# Altium PCB PCB2.PcbDoc (part 1 of 2)
Units mm, origin at the board's own origin, x right, y up, seen from the top; angles counter-clockwise.
Board outline 39.5 x 39.5 mm, 4 copper layers (Top Layer, Mid Layer 1, Mid Layer 2, Bottom Layer), stack 1.57 mm thick; 82 components, 63 nets, 381 pads, 150 vias.
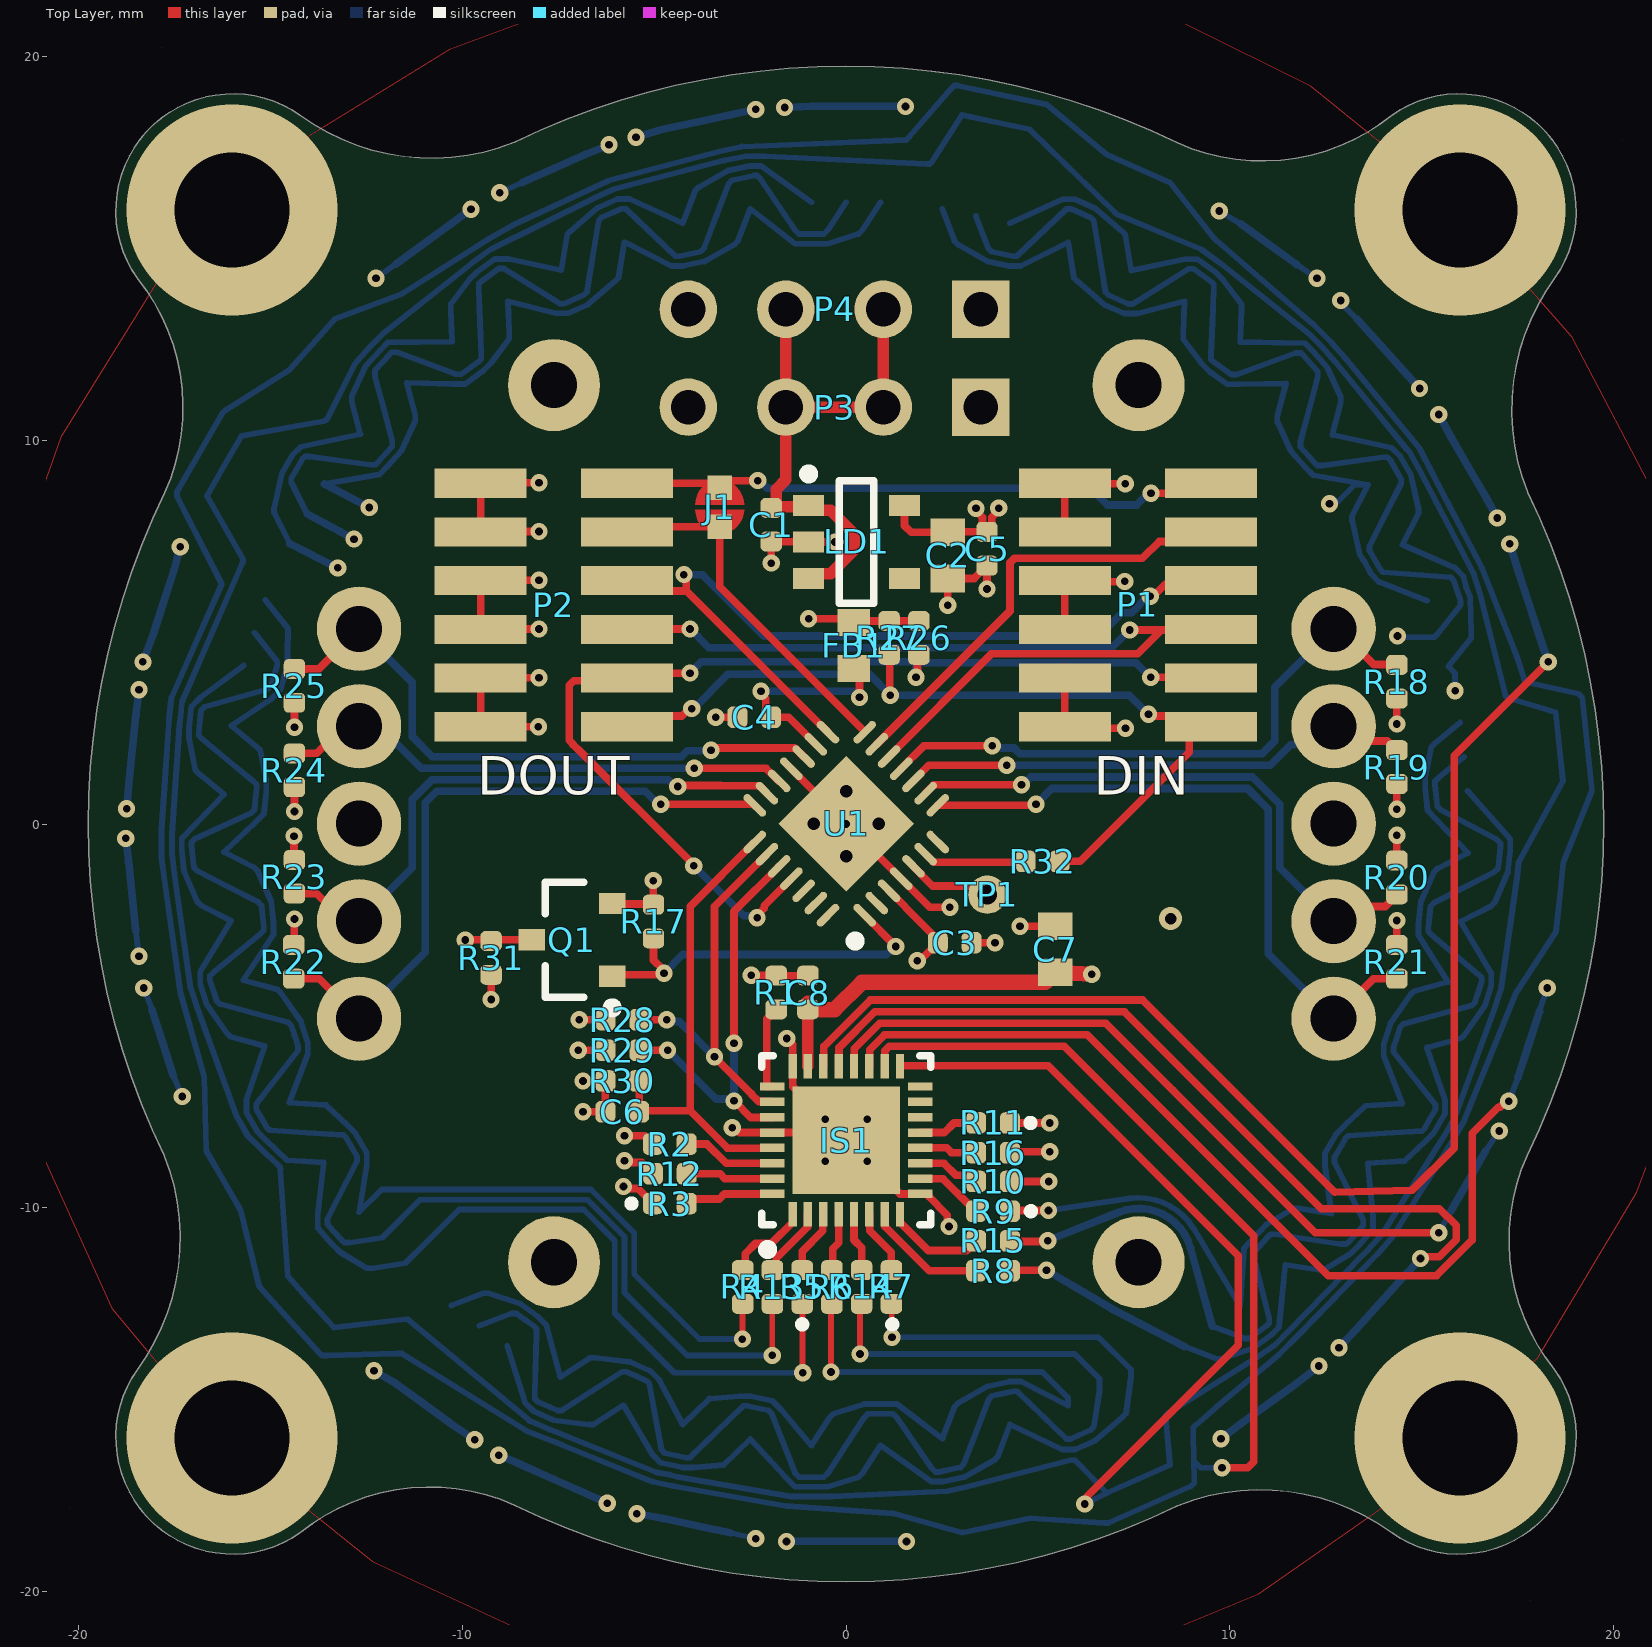
[diagram p0: Top Layer view]
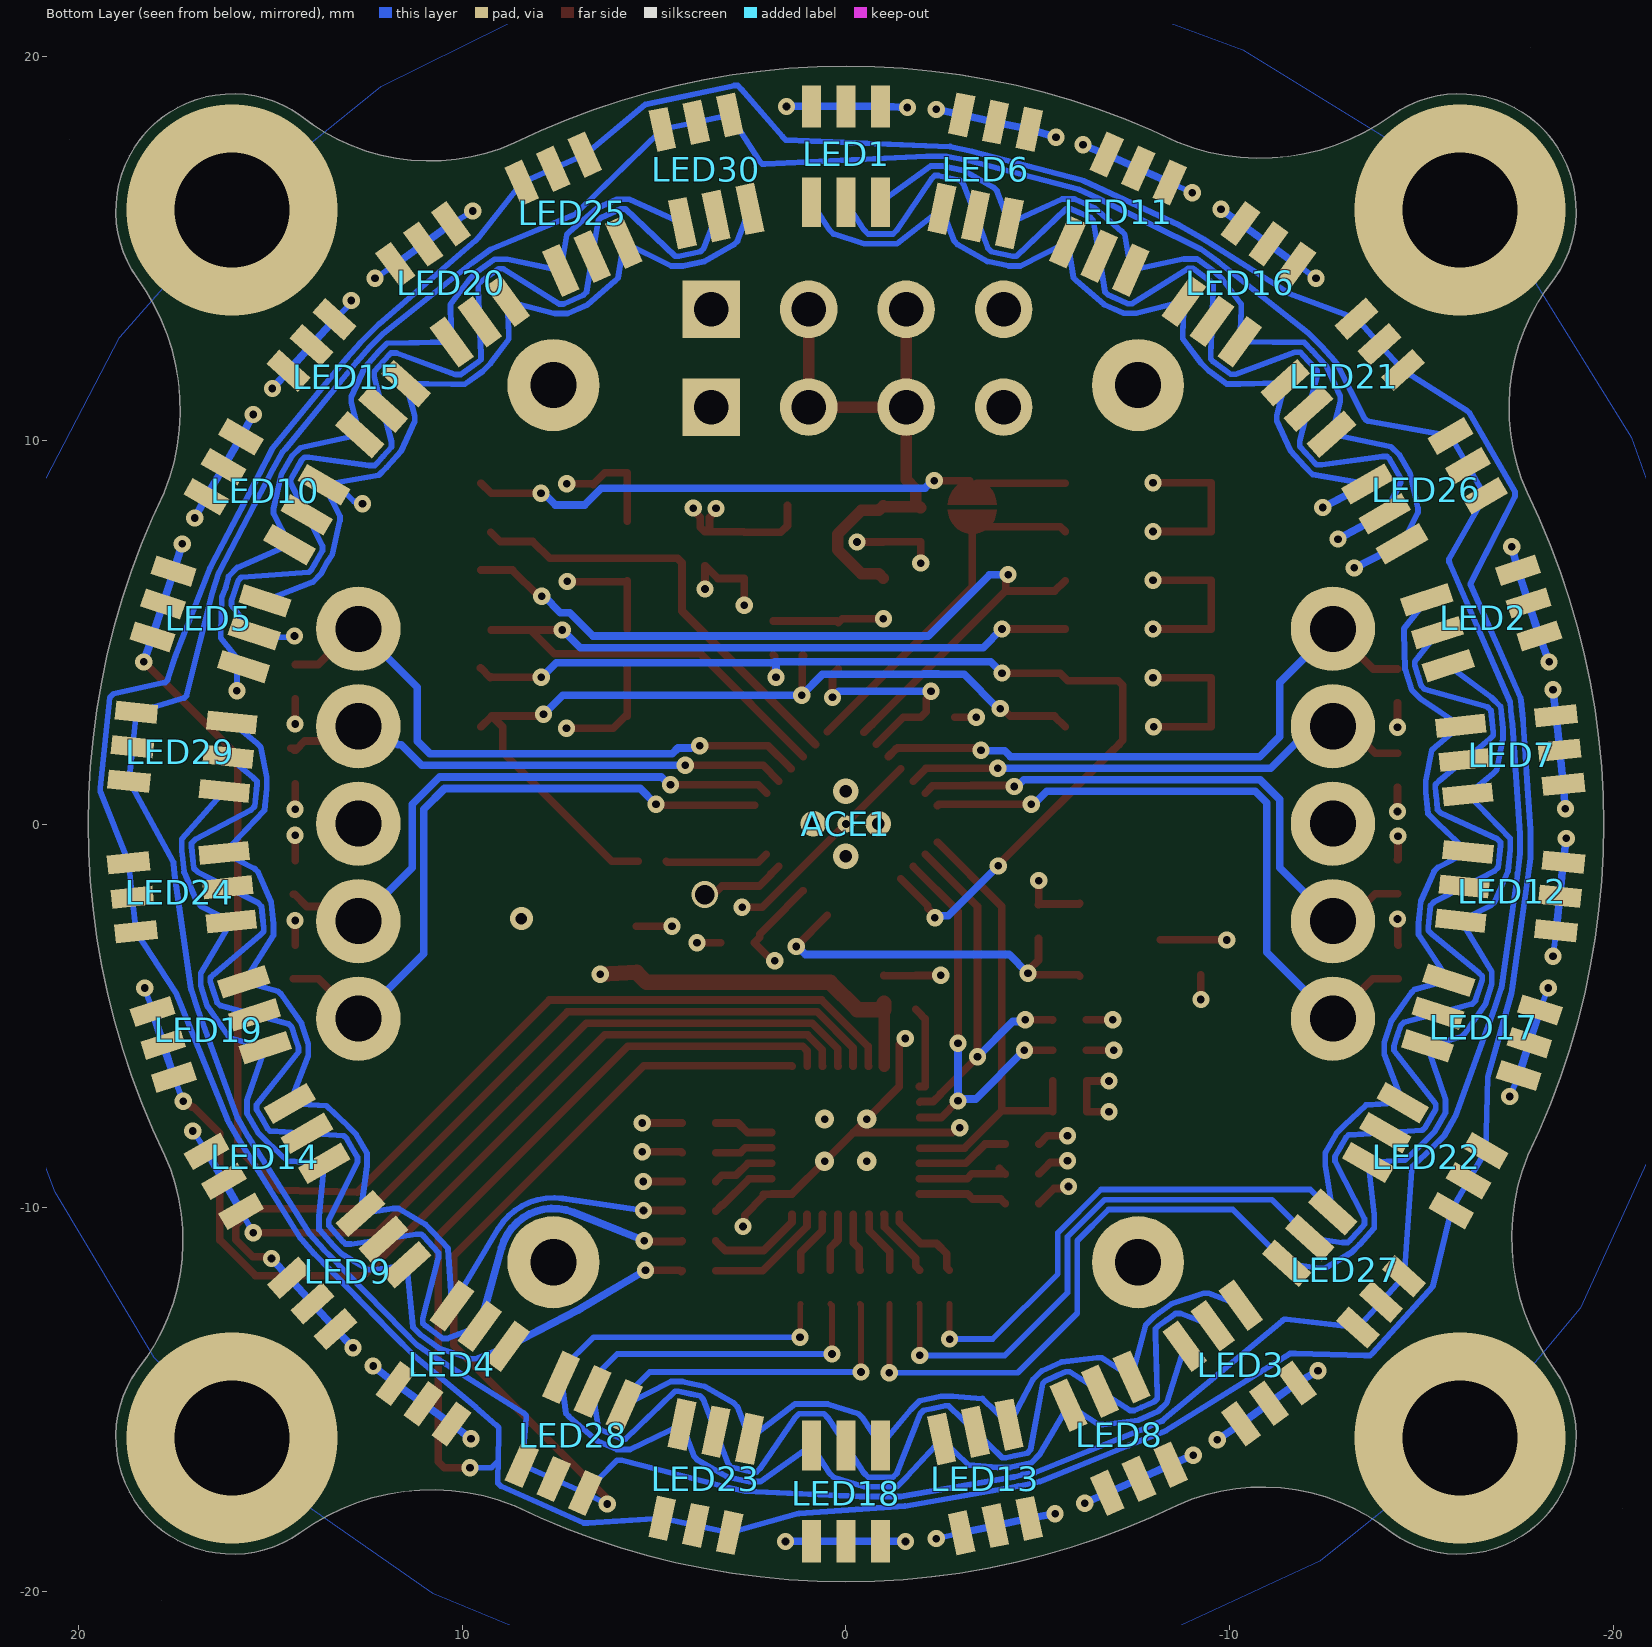
[diagram p1: Bottom Layer view, seen from below]
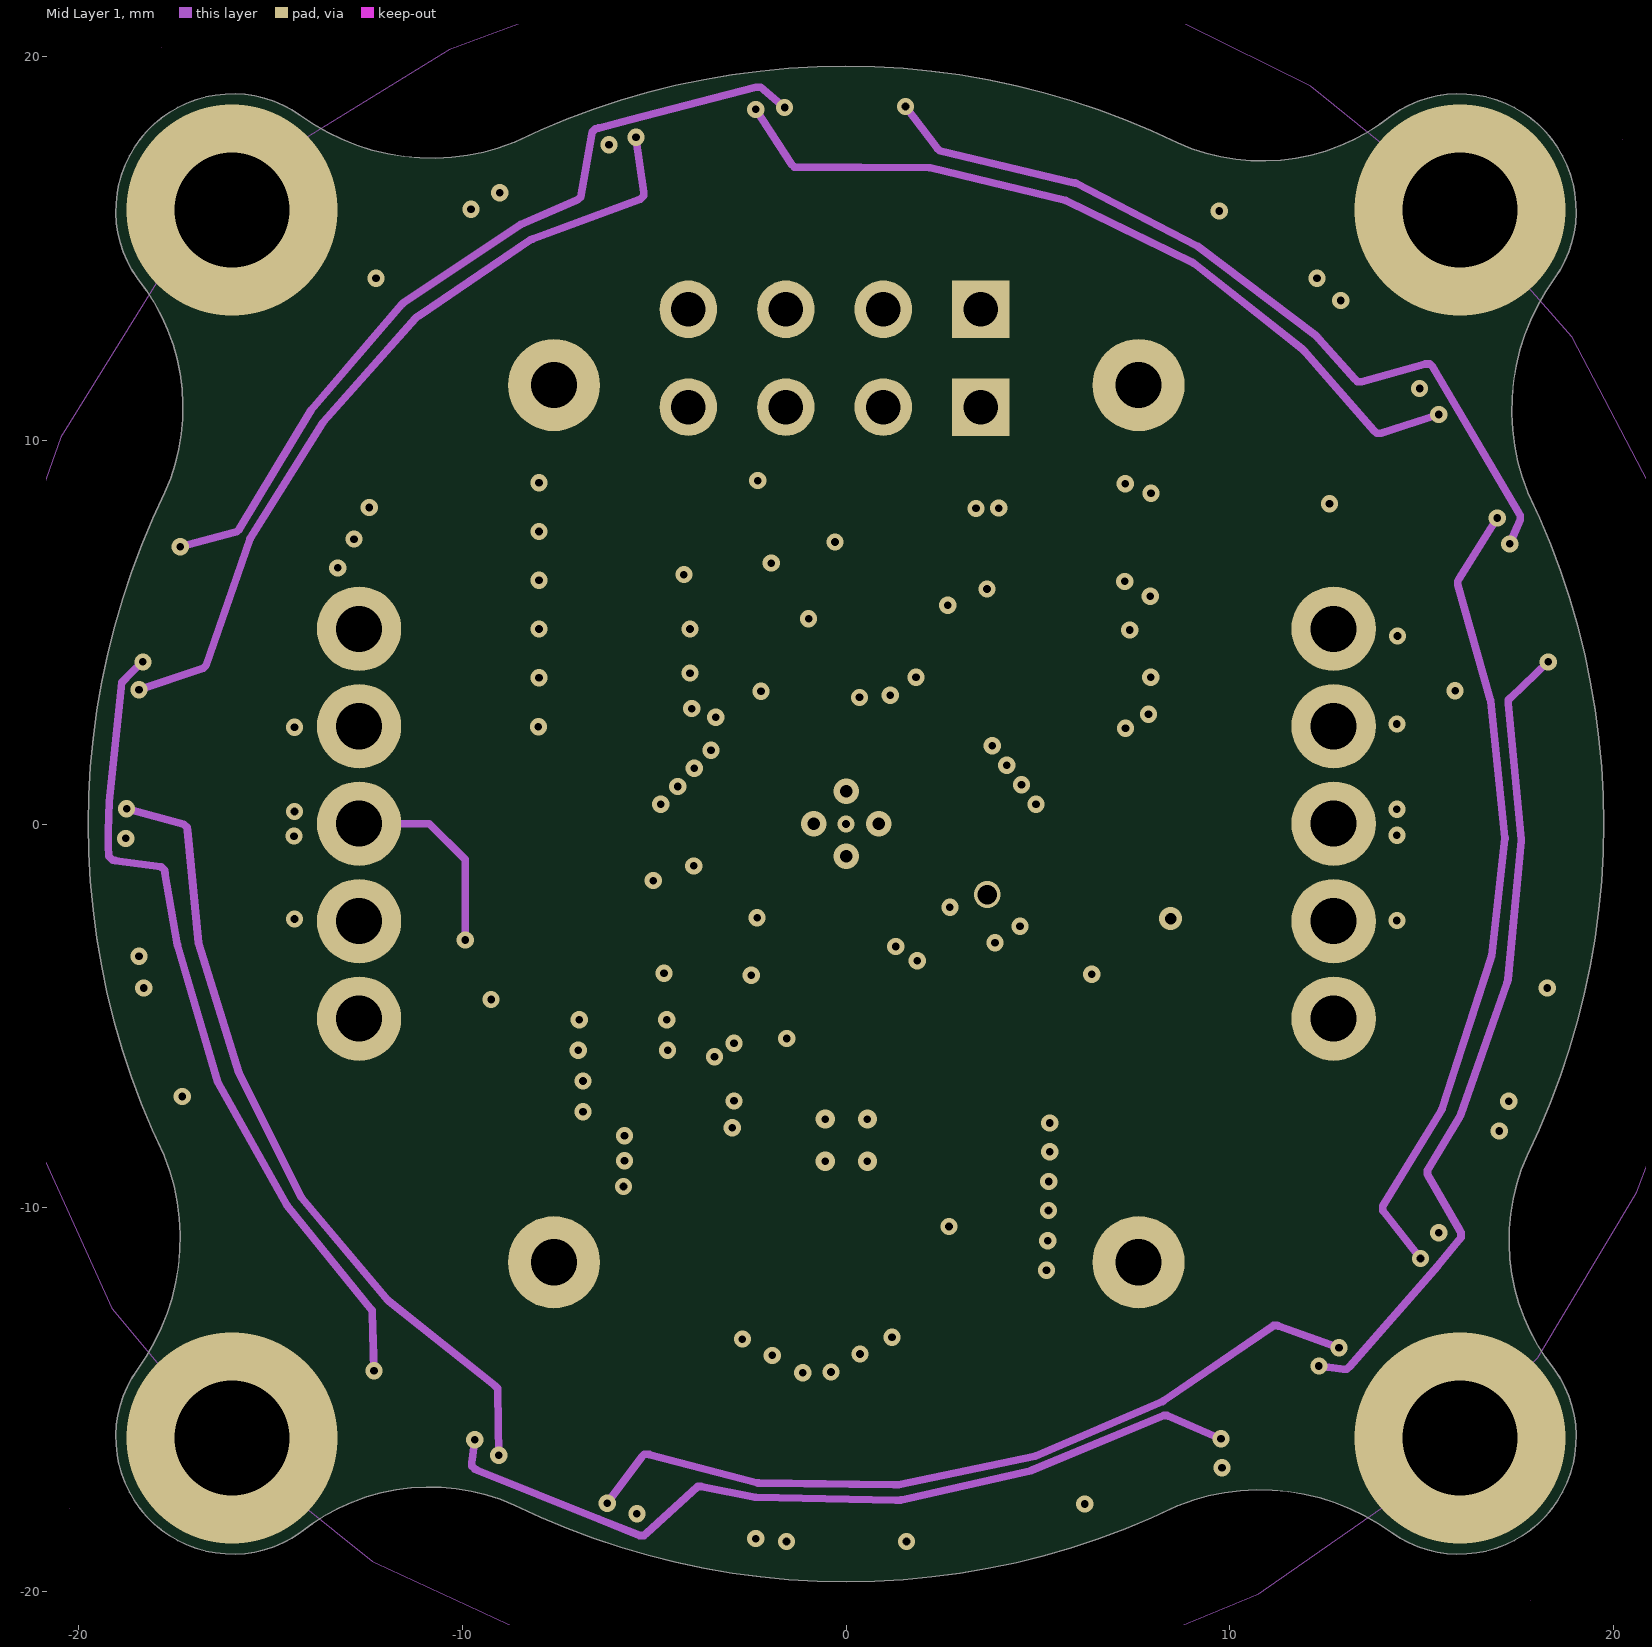
[diagram p2: Mid Layer 1]
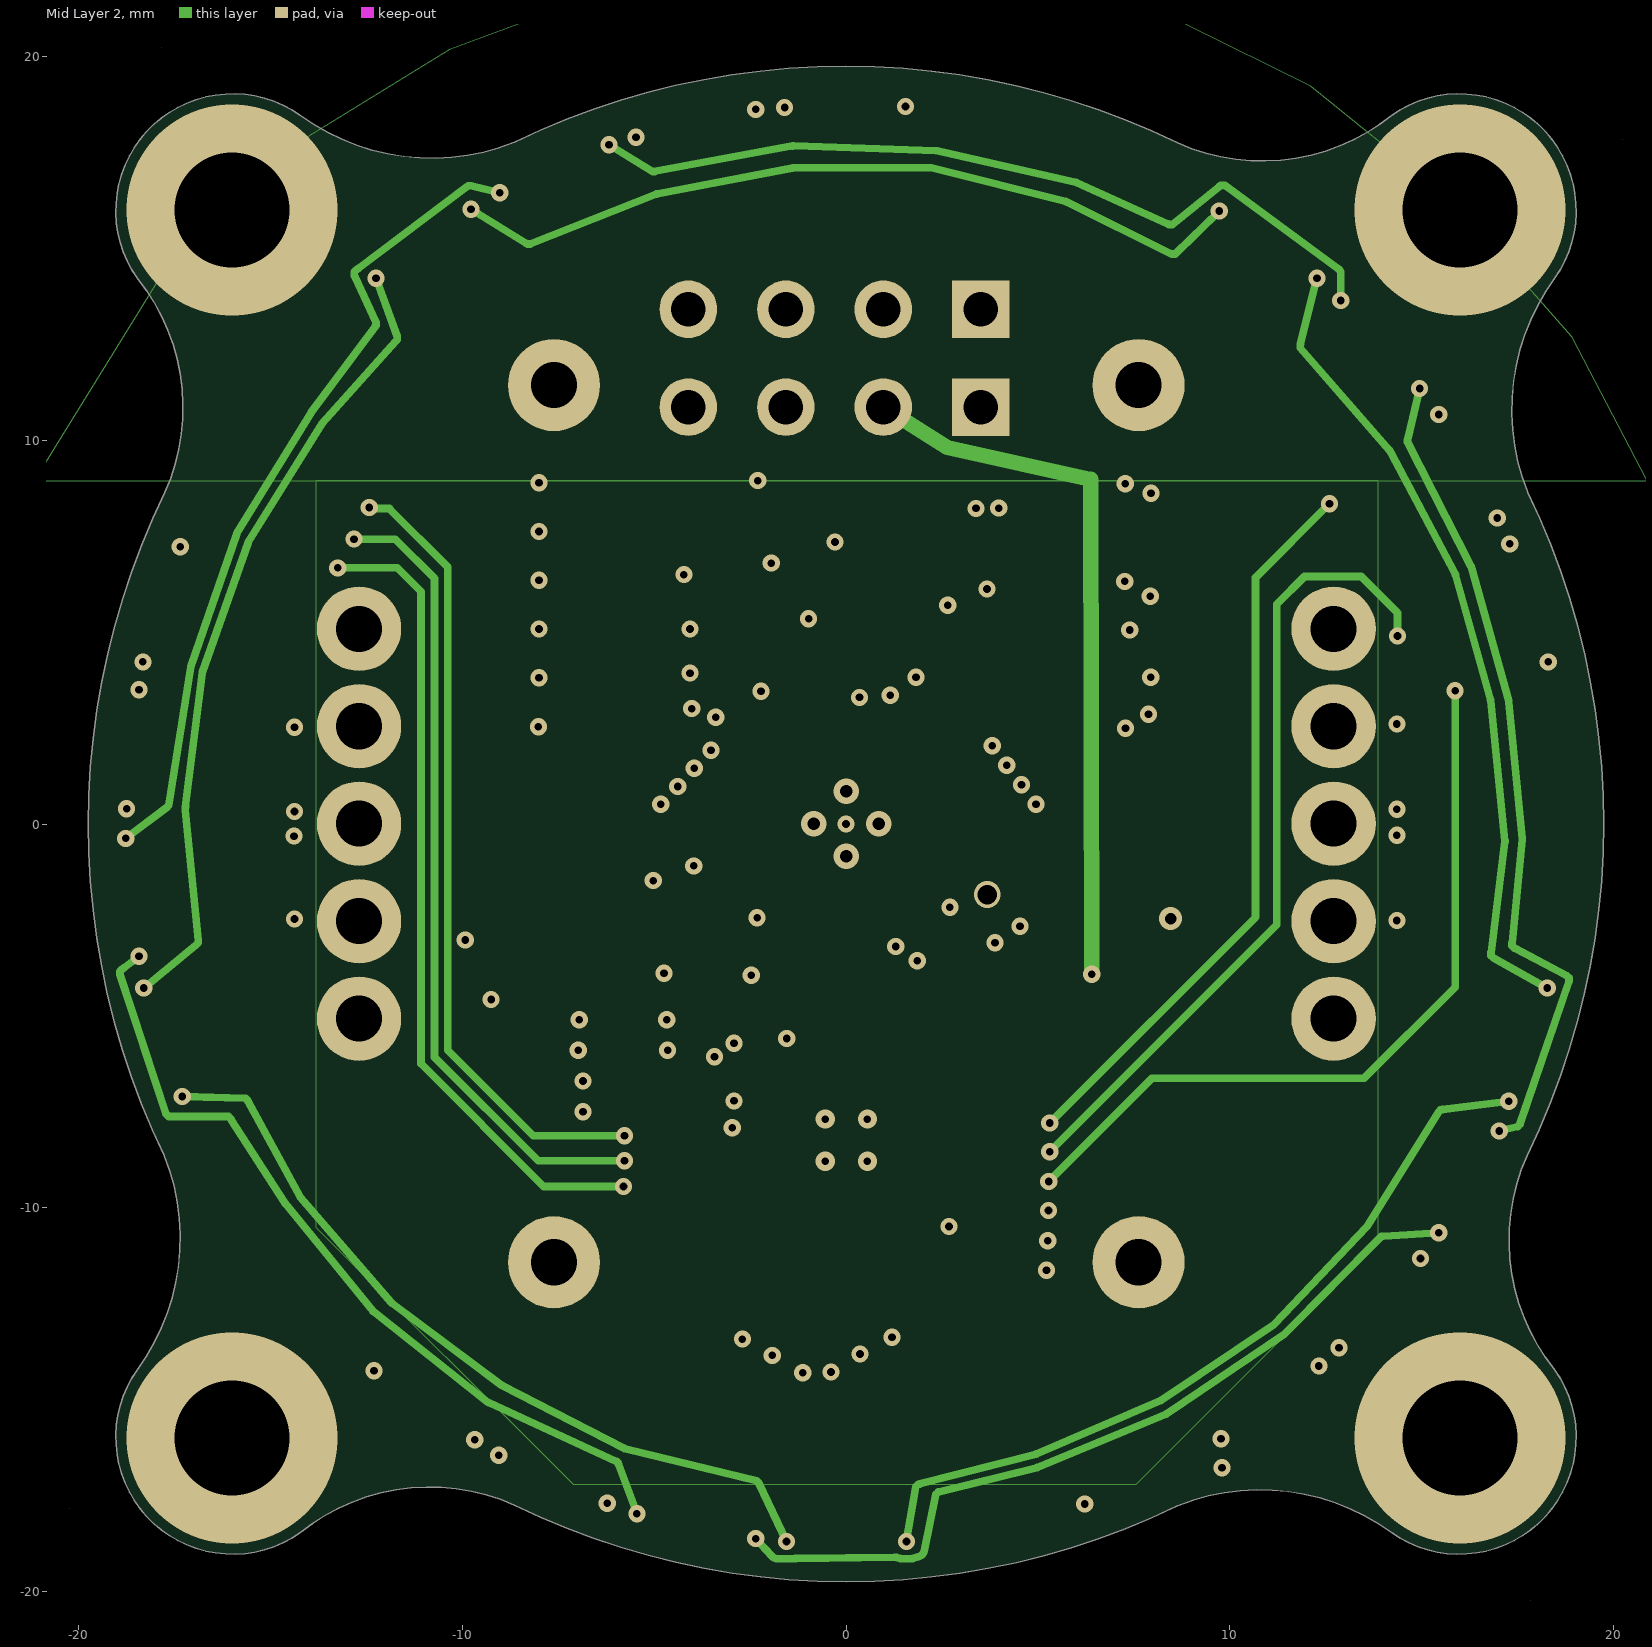
[diagram p3: Mid Layer 2]
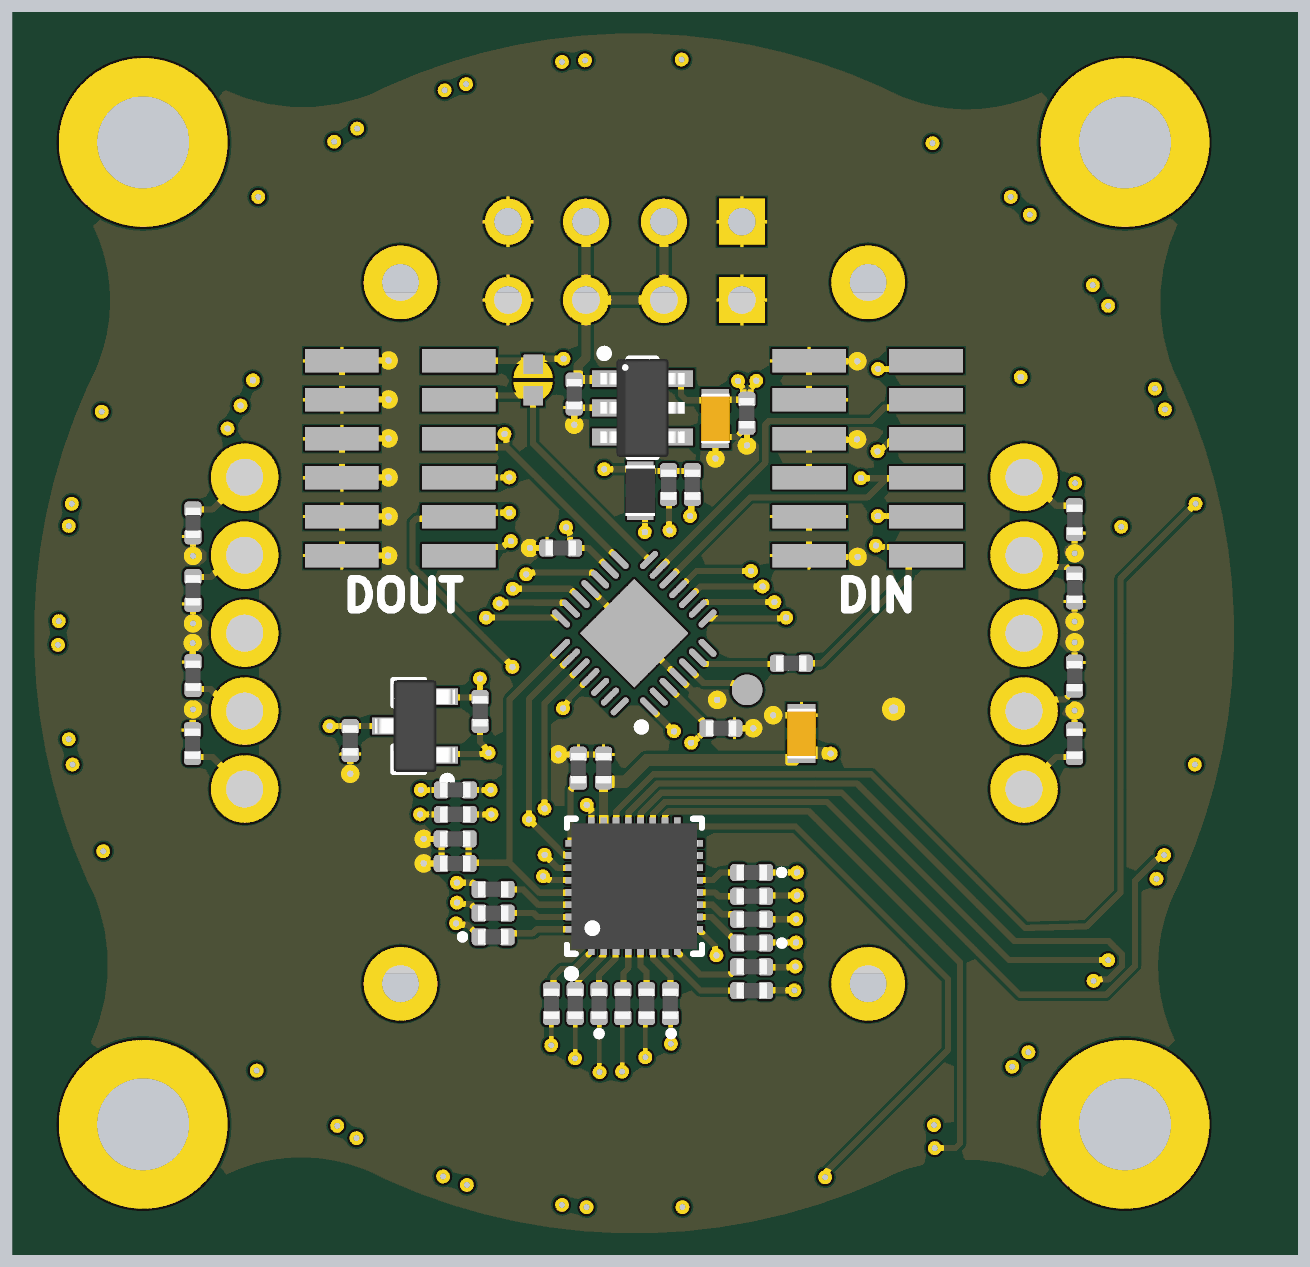
[diagram p5: 3D render of the assembled board from above, using the file's embedded part models]
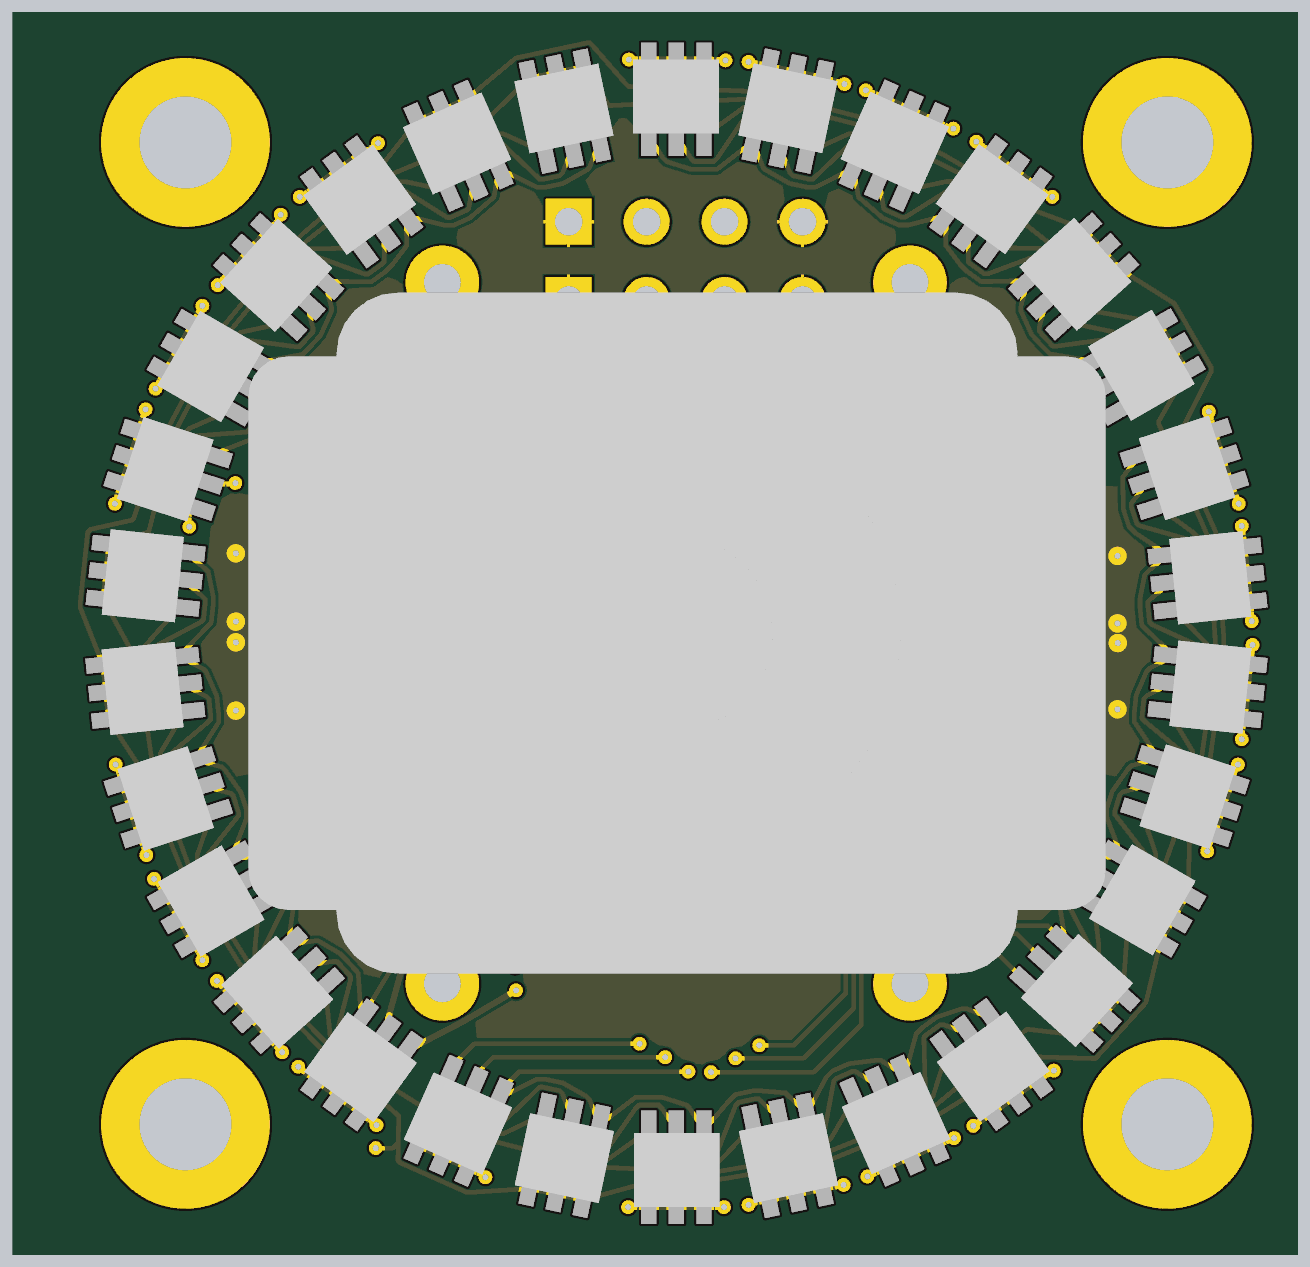
[diagram p6: 3D render of the assembled board from below, using the file's embedded part models]

## Layer stack, top to bottom
Top Solder: solder mask 0.0127, Solder Resist, Dk 3.8
Top Layer: signal copper 0.035
Dielectric 1: prepreg 0.2, 7628, Dk 4.6
Mid Layer 1: signal copper 0.0175
Core: core 1.065, FR-4, Dk 4.5
Mid Layer 2: signal copper 0.0175
Dielectric 2: prepreg 0.2, 7628, Dk 4.6
Bottom Layer: signal copper 0.035
Bottom Solder: solder mask 0.0127, Solder Resist, Dk 3.8

## Board outline
-18.471,-14.229 ccw(c-23.162,-10.799) -17.765,-8.645 cw(c0,-0.016) -17.753,8.639 ccw(c-22.668,10.848) -18.471,14.229 cw(c-15.987,15.987) -14.229,18.471 ccw(c-10.799,23.162) -8.645,17.765 cw(c-0.016,0) 8.639,17.753 ccw(c10.848,22.668) 14.229,18.471 cw(c15.987,15.987) 18.471,14.229 ccw(c23.162,10.799) 17.765,8.645 cw(c0,0.016) 17.753,-8.639 17.753,-8.638 ccw(c22.668,-10.848) 18.471,-14.229 cw(c15.987,-15.987) 14.229,-18.471 ccw(c10.799,-23.162) 8.645,-17.765 cw(c0.016,0) -8.639,-17.753 ccw(c-10.848,-22.668) -14.229,-18.471 cw(c-15.987,-15.987)
cut-out: 20.233,17.833
cut-out: -17.833,20.233
cut-out: -20.233,-17.833
cut-out: 17.833,-20.233
cut-out: 21.608,18.433

## Design rules (kind name [scope] priority, off if disabled: settings)
BoardOutlineClearance [All] p1: gap=0.2 ignorepadtopadclearanceinfootprint=FALSE
Clearance [All] p1: gap=0.102 ignorepadtopadclearanceinfootprint=FALSE except(0.127: Arc-Via Track-Via SMDPad-Via THPad-Via Via-Via Via-Fill Via-Poly Via-Region Via-Text; 0.25: Arc-Hole Track-Hole SMDPad-Hole THPad-Hole Via-Hole Fill-Hole Poly-Hole Region-Hole Text-Hole)
ComponentClearance [All] p1: gap=0.102 collisioncheckmode=3 verticalgap=0.102 showdistances=TRUE
DiffPairsRouting [All] p1: maxlimit=0.102 minlimit=0.102 mostfreqgap=0.102 toplayer_minwidth=0.102 toplayer_maxwidth=1816.048 toplayer_prefwidth=0.102 midlayer1_minwidth=0.102 midlayer1_maxwidth=1816.048 midlayer1_prefwidth=0.102 midlayer2_minwidth=0.102 midlayer2_maxwidth=1816.048 midlayer2_prefwidth=0.102 bottomlayer_minwidth=0.102 bottomlayer_maxwidth=1816.048 bottomlayer_prefwidth=0.102 maxuncoupledlength=12.7
Height [All] p1: minheight=0 maxheight=1816.048 prefheight=12.7
HoleSize [All] p1: absolutevalues=TRUE maxlimit=6.3 minlimit=0.2 maxpercent=80.000 minpercent=20.000
HoleToHoleClearance [All] p1: gap=0.25 allowstackedmicrovias=FALSE
MinimumAnnularRing [All] p1: minimumring=0.076
MinimumSolderMaskSliver [All] p1: minsoldermaskwidth=0
PlaneClearance [All] p1: clearance=0.102
PlaneConnect PlaneConnectPowerPads [InPadClass('PowerPads')] p1: planeconnectstyle=Direct reliefexpansion=0.508 reliefentries=4 reliefconductorwidth=0.254 reliefairgap=0.254
PlaneConnect [All] p2: pad.planeconnectstyle=Relief pad.reliefexpansion=0.3 pad.reliefentries=4 pad.reliefconductorwidth=0.102 pad.reliefairgap=0.102 via.planeconnectstyle=Direct via.reliefexpansion=0.3 via.reliefentries=4 via.reliefconductorwidth=0.127 via.reliefairgap=0.127
PolygonConnect PolygonConnectPowerPads [All vs (InPadClass('PowerPads'))] p1: connectstyle=Direct reliefconductorwidth=0.254 reliefentries=4 polygonreliefangle="90 Angle" airgapwidth=0.254
PolygonConnect [All] p2: thpad.connectstyle=Relief thpad.reliefconductorwidth=0.102 thpad.reliefentries=4 thpad.polygonreliefangle="90 Angle" thpad.airgapwidth=0.102 smdpad.connectstyle=Relief smdpad.reliefconductorwidth=0.102 smdpad.reliefentries=4 smdpad.polygonreliefangle="90 Angle" smdpad.airgapwidth=0.102 via.connectstyle=Direct via.reliefconductorwidth=0.127 via.reliefentries=4 via.polygonreliefangle="90 Angle" via.airgapwidth=0.127
RoutingVias [All] p1: holewidth=0.2 width=0.45 viastyle="Through Hole" minholewidth=0.2 minwidth=0.45 maxholewidth=6.3 maxwidth=6.55
SilkToSilkClearance [All] p1: silktosilkclearance=0
SilkToSolderMaskClearance [IsPad] p1: minsilkscreentomaskgap=0.102 clearancetoexposedcopper=TRUE
SolderMaskExpansion [All] p1: expansion=0.075 istentingtop=FALSE
Width [All] p1: maxlimit=1816.048 minlimit=0.102 preferedwidth=0.102
20 further rules are at their usual default settings.

## Classes and differential pairs
component class U_led_ring: C7 C8 IS1 LED1 LED2 LED3 LED4 LED5 LED6 LED7 LED8 LED9 LED10 LED11 LED12 LED13 LED14 LED15 LED16 LED17 LED18 LED19 LED20 LED21 LED22 LED23 LED24 LED25 LED26 LED27 LED28 LED29 LED30 R2 R3 R4 R5 R6 R7 R8 R9 R10 R11 R12 R13 R14 R15 R16
component class U_ACE: ACE1 Q1 R17 R18 R19 R20 R21 R22 R23 R24 R25 R31
component class main_sch: C1 C2 C3 C4 C5 C6 FB1 J1 LD1 P1 P2 P3 P4 R1 R26 R27 R28 R29 R30 R32 TP1 U1

## Components (designator, comment, footprint, x,y, rotation, side; value= is the part's Value field where it differs from the comment)
ACE1 "Bourns ACE 128" "BOURNS ACE 128" 0.008,0.008 r0 bottom locked
C1 "100n" R1005_0402i_L -1.95,7.8 r270 top
C2 "1u" C1608_0603I_L 2.65,7 r270 top
C3 "100n" R1005_0402i_L 2.833,-3.092 r0 top
C4 "100n" R1005_0402i_L -2.392,2.783 r180 top
C5 "100n" R1005_0402i_L 3.675,7.175 r270 top
C6 "100n" R1005_0402i_L -5.831,-7.498 r180 top
C7 "1u" C1608_0603I_L 5.458,-3.267 r90 top
C8 "100n" R1005_0402i_L -0.992,-4.392 r90 top
FB1 "FERITTE BEAD" R1608_0603I_L 0.2,4.65 r270 top
IS1 "IS31FL3729" QFN40P400X400X80_HS-33L 0.008,-8.242 r90 top
J1 "Terminator" solderJumper -3.292,8.258 r270 top
LD1 "NCP115 3.3V" TSOP95P280X110-6L 0.275,7.35 r0 top
LED1 "SMB-LED" ASMB-LED 0,17.504 r270 bottom
LED2 "SMB-LED" ASMB-LED -16.652,5.386 r342 bottom
LED3 "SMB-LED" ASMB-LED -10.32,-14.129 r54 bottom
LED4 "SMB-LED" ASMB-LED 10.306,-14.139 r126 bottom
LED5 "SMB-LED" ASMB-LED 16.66,5.362 r198 bottom
LED6 "SMB-LED" ASMB-LED -3.647,17.12 r282 bottom
LED7 "SMB-LED" ASMB-LED -17.407,1.801 r354 bottom
LED8 "SMB-LED" ASMB-LED -7.149,-15.969 r66 bottom
LED9 "SMB-LED" ASMB-LED 13.019,-11.691 r138 bottom
LED10 "SMB-LED" ASMB-LED 15.181,8.709 r210 bottom
LED11 "SMB-LED" ASMB-LED -7.127,15.987 r294 bottom
LED12 "SMB-LED" ASMB-LED -17.411,-1.763 r6 bottom
LED13 "SMB-LED" ASMB-LED -3.644,-17.112 r78 bottom
LED14 "SMB-LED" ASMB-LED 15.174,-8.713 r150 bottom
LED15 "SMB-LED" ASMB-LED 13.036,11.68 r222 bottom
LED16 "SMB-LED" ASMB-LED -10.302,14.15 r306 bottom
LED17 "SMB-LED" ASMB-LED -16.667,-5.331 r18 bottom
LED18 "SMB-LED" ASMB-LED 0,-17.496 r90 bottom
LED19 "SMB-LED" ASMB-LED 16.653,-5.373 r162 bottom
LED20 "SMB-LED" ASMB-LED 10.313,14.142 r234 bottom
LED21 "SMB-LED" ASMB-LED -13.019,11.698 r318 bottom
LED22 "SMB-LED" ASMB-LED -15.185,-8.695 r30 bottom
LED23 "SMB-LED" ASMB-LED 3.664,-17.108 r102 bottom
LED24 "SMB-LED" ASMB-LED 17.408,-1.785 r174 bottom
LED25 "SMB-LED" ASMB-LED 7.141,15.981 r246 bottom
LED26 "SMB-LED" ASMB-LED -15.168,8.733 r330 bottom
LED27 "SMB-LED" ASMB-LED -13.054,-11.652 r42 bottom
LED28 "SMB-LED" ASMB-LED 7.135,-15.976 r114 bottom
LED29 "SMB-LED" ASMB-LED 17.398,1.889 r186 bottom
LED30 "SMB-LED" ASMB-LED 3.657,17.118 r258 bottom
P1 "Input" "1.27MM SMD CONN" 7.608,5.708 r90 top
P2 "Output" "1.27MM SMD CONN" -7.617,5.708 r90 top
P3 "PWR" HDR1X4 3.511,10.866 r180 top
P4 "PWR" HDR1X4 3.511,13.416 r180 top
Q1 "NX3008PBKT" SOT95P230X110-3L -7.142,-3.017 r180 top
R1 "10k" R1005_0402i_L -1.817,-4.392 r90 top
R2 "20" R1005_0402i_L -4.592,-8.342 r180 top
R3 "51" R1005_0402i_L -4.592,-9.892 r180 top
R4 "20" R1005_0402i_L -2.692,-12.067 r270 top
R5 "51" R1005_0402i_L -1.142,-12.067 r270 top
R6 "20" R1005_0402i_L -0.367,-12.067 r270 top
R7 "51" R1005_0402i_L 1.183,-12.067 r270 top
R8 "20" R1005_0402i_L 3.833,-11.642 r0 top
R9 "51" R1005_0402i_L 3.833,-10.092 r0 top
R10 "20" R1005_0402i_L 3.833,-9.317 r0 top
R11 "51" R1005_0402i_L 3.833,-7.792 r0 top
R12 "20" R1005_0402i_L -4.592,-9.117 r180 top
R13 "20" R1005_0402i_L -1.917,-12.067 r270 top
R14 "20" R1005_0402i_L 0.408,-12.067 r270 top
R15 "20" R1005_0402i_L 3.833,-10.867 r0 top
R16 "20" R1005_0402i_L 3.833,-8.567 r0 top
R17 "100k" R1005_0402i_L -5.017,-2.542 r90 top
R18 "10k" R1005_0402i_L 14.358,3.708 r90 top
R19 "10k" R1005_0402i_L 14.358,1.483 r90 top
R20 "10k" R1005_0402i_L 14.358,-1.392 r270 top
R21 "10k" R1005_0402i_L 14.358,-3.592 r270 top
R22 "10k" R1005_0402i_L -14.392,-3.592 r270 top
R23 "10k" R1005_0402i_L -14.375,-1.375 r270 top
R24 "10k" R1005_0402i_L -14.375,1.4 r90 top
R25 "10k" R1005_0402i_L -14.375,3.6 r90 top
R26 "100k" R1005_0402i_L 1.9,4.85 r270 top
R27 "100k" R1005_0402i_L 1.125,4.85 r270 top
R28 "10k" R1005_0402i_L -5.825,-5.1 r0 top
R29 "10k" R1005_0402i_L -5.825,-5.9 r0 top
R30 "100k" R1005_0402i_L -5.831,-6.698 r180 top
R31 "100k" R1005_0402i_L -9.25,-3.49 r90 top
R32 "500" R1005_0402i_L 5.125,-0.975 r180 top
TP1 "PAD" PAD 3.683,-1.842 r90 top
U1 "ATtiny88-MMU" 28M1_N 0.008,0.008 r135 top

## Footprints (in the part's own frame and the unit in brackets; to place one, negate y for a bottom-side part, rotate by r counter-clockwise, add the part's x,y. Pads: shape width x height; smd on the part's side, far side on the other; paste and mask are expansions set on the pad)
"1.27MM SMD CONN" [mm]
  rect 0.76x2.4 smd: 1(3.175,1.905) 2(3.175,-1.905) 3(1.905,1.905) 4(1.905,-1.905) 5(0.635,1.905) 6(0.635,-1.905) 7(-0.635,1.905) 8(-0.635,-1.905) 9(-1.905,1.905) 10(-1.905,-1.905) 11(-3.175,1.905) 12(-3.175,-1.905)
28M1_N [mm] "QFN, 28-Leads, Body 4x4mm, Pitch 0.45mm, IPC Medium Density"
  oval 0.75x0.2 smd: 1(-2.025,1.35) 2(-2.025,0.9) 3(-2.025,0.45) 4(-2.025,0) 5(-2.025,-0.45) 6(-2.025,-0.9) 7(-2.025,-1.35) 15(2.025,-1.35) 16(2.025,-0.9) 17(2.025,-0.45) 18(2.025,0) 19(2.025,0.45) 20(2.025,0.9) 21(2.025,1.35)
  oval 0.2x0.75 smd: 8(-1.35,-2.025) 9(-0.9,-2.025) 10(-0.45,-2.025) 11(0,-2.025) 12(0.45,-2.025) 13(0.9,-2.025) 14(1.35,-2.025) 22(1.35,2.025) 23(0.9,2.025) 24(0.45,2.025) 25(0,2.025) 26(-0.45,2.025) 27(-0.9,2.025) 28(-1.35,2.025)
  rect 2.5x2.5 smd: 29(0,0)
  silkscreen extent -2.45,1.88 -2.2,2.12, body extent -2.02,-2.02 2.02,2.02, height 1
ASMB-LED [mm]
  rect 1.1x0.5 smd: 1(-1.2,0.9) 3(-1.2,0) 5(-1.2,-0.9)
  rect 1.3x0.5 smd: 2(1.3,0.9) 4(1.3,0) 6(1.3,-0.9)
  body extent -1.19,-1.41 1.21,1.39, height 2.8
"BOURNS ACE 128" [mm]
  round 2.2 hole 1.2: 1(-12.7,5.08) 2(-12.7,2.54) 3(-12.7,0) 4(-12.7,-2.54) 5(-12.7,-5.08) 6(12.7,-5.08) 7(12.7,-2.54) 8(12.7,0) 9(12.7,2.54) 10(12.7,5.08)
  round 2.4 hole 1.2: ""(-7.62,-11.43) ""(-7.62,11.43) ""(7.62,-11.43) ""(7.62,11.43)
  body extent -14,-11.1 13.94,11.1, height 27.55
C1608_0603I_L [mm] "Chip Capacitor, 2-Leads, Body 1.57x0.85mm, IPC High Density"
  rect 0.72x0.9 smd: 1(-0.6,0) 2(0.6,0)
  body extent -0.82,-0.48 0.82,0.48, height 0.95
HDR1X4 [mm] "Connector; Header; 4 Position"
  rect 1.5x1.5 hole 0.9: 1(0,0)
  round 1.5 hole 0.9: 2(2.54,0) 3(5.08,0) 4(7.62,0)
PAD [mm]
  round 1 smd: 1(0,0)
QFN40P400X400X80_HS-33L [mm] "QFN, 32-Leads, Body 4,00x4,00mm, Pitch 0,40mm, Thermal Pad 2,80x2,80mm, IPC High Density"
  rect 0.64x0.22 smd: 1(-1.925,1.4) 2(-1.925,1) 3(-1.925,0.6) 4(-1.925,0.2) 5(-1.925,-0.2) 6(-1.925,-0.6) 7(-1.925,-1) 8(-1.925,-1.4) 17(1.925,-1.4) 18(1.925,-1) 19(1.925,-0.6) 20(1.925,-0.2) 21(1.925,0.2) 22(1.925,0.6) 23(1.925,1) 24(1.925,1.4)
  rect 0.22x0.64 smd: 9(-1.4,-1.925) 10(-1,-1.925) 11(-0.6,-1.925) 12(-0.2,-1.925) 13(0.2,-1.925) 14(0.6,-1.925) 15(1,-1.925) 16(1.4,-1.925) 25(1.4,1.925) 26(1,1.925) 27(0.6,1.925) 28(0.2,1.925) 29(-0.2,1.925) 30(-0.6,1.925) 31(-1,1.925) 32(-1.4,1.925)
  rect 2.8x2.8 smd: 33(0,0)
  silkscreen extent -2.97,-2.2 2.2,2.2, body extent -2.05,-2.05 2.05,2.05, height 0.8
R1005_0402i_L [mm] "Resistor, Chip; 1.00 mm L X 0.50 mm W X 0.40 mm H body"
  rrect50% 0.52x0.56 smd: 1(-0.44,0) 2(0.44,0)
  body extent -0.5,-0.25 0.5,0.25, height 0.4
R1608_0603I_L [mm] "Chip Resistor, 2-Leads, Body 1.57x0.85mm, IPC High Density"
  rect 0.7x0.85 smd: 1(-0.6,0) 2(0.6,0)
  body extent -0.82,-0.48 0.82,0.48, height 0.5
solderJumper [mil]
  rect 25x25 smd: 1(20,0) 2(-20,0)
  Top Layer region: 2.51,25 12.08,23.1 20.19,17.68 25.61,9.57 27.51,0 27.51,0 25.61,-9.57 20.19,-17.68 12.08,-23.1 2.51,-25 2.51,-25
  Top Layer region: -2.51,25 -12.08,23.1 -20.19,17.68 -25.61,9.57 -27.51,0 -27.51,0 -25.61,-9.57 -20.19,-17.68 -12.08,-23.1 -2.51,-25 -2.51,-25
SOT95P230X110-3L [mm] "SOT23, 3-Leads, Body 2,90x2,30mm, Pitch 0,95mm, IPC High Density"
  rect 0.7x0.55 smd: 1(-1.05,0.95) 2(-1.05,-0.95) 3(1.05,0)
  silkscreen extent -1.18,-1.5 0.7,1.9, body extent -1.3,-1.5 1.3,1.5, height 1.1
TSOP95P280X110-6L [mm] "TSOP, 6-Leads, Body 2,87x1,50mm, Pitch 0,95mm, IPC High Density"
  rect 0.8x0.55 smd: 1(-1.25,0.95) 2(-1.25,0) 3(-1.25,-0.95) 4(1.25,-0.95) 5(1.25,0.95)
  silkscreen extent -1.37,-1.6 0.45,1.9, body extent -1.38,-1.6 1.38,1.6, height 1.1

## Part data
C1 C2 C3 C4 C5 C6 C7 C8: library part C, "Capacitor"
J1: library part JMP_mini
LED1 LED2 LED3 LED4 LED5 LED6 LED7 LED8 LED9 LED10 LED11 LED12 LED13 LED14 LED15 LED16 LED17 LED18 LED19 LED20 LED21 LED22 LED23 LED24 LED25 LED26 LED27 LED28 LED29 LED30: library part ASMB-LED
P1 P2: library part "Header 6X2", "Header, 6-Pin, Dual row", LatestRevisionDate=17-Jul-2002, LatestRevisionNote="Re-released for DXP Platform.", Publisher="Altium Limited"
P3 P4: library part "Header 4", "Header, 4-Pin", LatestRevisionDate=17-Jul-2002, LatestRevisionNote="Re-released for DXP Platform.", Publisher="Altium Limited"
Q1: library part MOSFET-P, "P-Channel MOSFET", LatestRevisionDate=17-Jul-2002, LatestRevisionNote="Re-released for DXP Platform.", PackageDescription="TO, Flat Index; 3 In-Line, Axial Leads; Body Dia. 4.6mm; Lead Dia. 0.5 mm (max)", PackageReference=E3, PackageVersion=1995/1996, Published=8-Jun-2000, Publisher="Altium Limited"
R1 R2 R3 R4 R5 R6 R7 R8 R9 R10 R11 R12 R13 R14 R15 R16 R17 R18 R19 R20 R21 R22 R23 R24 R25 R26 R27 R28 R29 R30 R31 R32: library part R, "R"
U1: "8-bit AVR Microcontroller, 1.8-5.5V, 8KB Flash, 64 Bytes EEPROM, 512 Bytes SRAM, 28-pin MLF, Industrial Grade (-40°C to 85°C), Pb-Free", Supplier Part Number 1=ATTINY88-MMU-ND, ComponentLink1Description="Manufacturer Link", ComponentLink1URL=http://www.atmel.com/products/avr/default.asp?, ComponentLink2Description="ATtiny48/88 Datasheet", ComponentLink2URL=http://www.atmel.com/dyn/resources/prod_documents/doc8008.pdf, ComponentLink3Description="ATtiny48/88 Summary", ComponentLink3URL=http://www.atmel.com/dyn/resources/prod_documents/8008S.pdf, ComponentLink4Description="Atmel.com Home", ComponentLink4URL=http://www.atmel.com, DatasheetVersion="revC, Mar-2009", PackageDescription="28-pad, 4x4x1.0mm Body, Pitch 0.45mm, 2.4x2.4mm Exposed Pad, Plastic Very Thin QFN Package (VQFN)", PackageReference=28M1, PackageVersion="revB, Nov-2008", Published=1-Apr-2010, Publisher="Altium Limited", Supplier 1=Digi-Key, Supplier 2=Mouser, Supplier Part Number 2=556-ATTINY88-MMU

## Via types
v1: diameter 0.45, hole 0.2, Top Layer to Bottom Layer, 136 vias
v2: diameter 5.5, hole 3, Top Layer to Bottom Layer, 4 vias
v3: diameter 0.5, hole 0.2, Top Layer to Bottom Layer, 4 vias
v4: diameter 0.66, hole 0.33, Top Layer to Bottom Layer, tented top, 4 vias
v5: diameter 0.6, hole 0.3, Top Layer to Bottom Layer, 1 vias
v6: diameter 0.7, hole 0.5, Top Layer to Bottom Layer, 1 vias

## Nets (pads, with @x,y where several pads share a name; then routed paths per layer and width w, separated by ;. In a path a pad name is that pad's centre, name@x,y a point inside that pad or via, vN(x,y) a via of type N, cw(c..) or ccw(c..) an arc to the next point about the centre after c; other vN are vias at no path point)
+3.3V: C2.1 C3.1 C5.1 FB1.1 LD1.5 Q1.2 R17.2 R26.1 R27.1 R28.1 R29.1 U1.3 | length 12.9
  Top Layer w0.2: v1(-6.975,-5.9) R29.1@-6.265,-5.9 ; v1(-6.95,-5.1) R28.1@-6.265,-5.1 ; Q1.2@-6.092,-2.067 -6.075,-2.085 -5.035,-2.085 R17.2@-5.021,-2.098 ; v1(-5.025,-1.475) -5.021,-1.479 R17.2@-5.021,-2.098 ; R17.2@-5.017,-2.102 R17.2@-5.021,-2.098 ; v1(-0.975,5.35) 0.1,5.35 FB1.1@0.2,5.25 0.24,5.29 R27.1@1.125,5.29 R26.1@1.9,5.29 ; U1.3@1.122,-1.742 1.977,-2.598 2.252,-2.872 2.252,-2.951 C3.1@2.393,-3.092 1.918,-3.567 v1(1.858,-3.567) ; LD1.5@1.525,8.3 1.525,7.775 1.7,7.6 C2.1@2.65,7.6 2.665,7.615 C5.1@3.675,7.615 ; v1(3.387,8.226) 3.387,8.158 3.556,7.99 3.556,7.734 C5.1@3.675,7.615 ; v1(3.982,8.233) 3.982,8.176 3.798,7.991 3.798,7.738 C5.1@3.675,7.615
+5: C1.1 C7.1 C8.1 IS1.23 LD1.1 LD1.3 P3.2 P3.3 P4.2 P4.3 | length 43
  Top Layer w0.3: P4.3@-1.569,13.416 P3.3@-1.569,10.866 ; IS1.23@-0.992,-6.317 C8.1@-0.992,-4.832 ; LD1.3@-0.975,6.4 -0.85,6.525 -0.403,6.525 0.214,7.142 0.214,7.558 -0.403,8.175 -0.85,8.175 LD1.1@-0.975,8.3 -1.005,8.27 C1.1@-1.9,8.27 ; P4.2@0.971,13.416 P3.2@0.971,10.866 P3.3@-1.569,10.866 ; C1.1@-1.9,8.27 -1.92,8.27 C1.1@-1.95,8.24 -1.93,8.24 C1.1@-1.9,8.27 ; C1.1@-1.9,8.27 -1.82,8.35 -1.82,8.72 -1.569,8.971 P3.3@-1.569,10.866
  Top Layer w0.4: C8.1@-0.992,-4.667 C8.1@-0.992,-4.832 -0.987,-4.837 -0.297,-4.837 ; -0.292,-4.842 -0.297,-4.837 ; v1(6.408,-3.917) C7.1@5.458,-3.867 5.198,-4.127 0.413,-4.127 -0.297,-4.837
  Mid Layer 2 w0.4: P3.2@0.971,10.866 2.636,9.814 6.376,8.985 v1(6.408,-3.917)
AVCC: C4.1 FB1.2 U1.16 | length 5.7
  Top Layer w0.2: v1(-2.217,3.458) -2.217,3.39 -2.093,3.267 -2.093,2.924 C4.1@-1.952,2.783 -1.494,2.783 U1.16@-0.787,2.076 ; FB1.2@0.2,4.05 0.35,3.9 v1(0.35,3.3)
  Bottom Layer w0.2: v1(-2.217,3.458) 0.192,3.458 v1(0.35,3.3)
D0: ACE1.1 R22.2 U1.21 | length 17.3
  Top Layer w0.2: R22.2@-14.392,-4.032 -13.732,-4.032 ACE1.1@-12.692,-5.072 ; v1(-4.826,0.512) -2.417,0.512 U1.21@-2.386,0.481
  Bottom Layer w0.2: ACE1.1@-12.7,-5.076 -10.963,-3.339 -10.963,0.553 -10.665,0.851 -5.232,0.851 -4.894,0.512 v1(-4.826,0.512)
D1: ACE1.2 R23.2 U1.20 | length 15.4
  Top Layer w0.2: R23.2@-14.375,-1.815 -13.795,-1.815 -13.078,-2.532 ACE1.2@-12.692,-2.532 ; v1(-4.388,0.977) -4.364,1.002 -3.266,1.002 -3.262,0.998 -2.255,0.998 U1.20@-2.062,0.805
  Bottom Layer w0.2: ACE1.2@-12.7,-2.536 -11.303,-1.139 -11.303,0.639 -10.79,1.152 -4.63,1.152 -4.455,0.977 v1(-4.388,0.977)
D2: ACE1.4 R24.2 U1.19 | length 13.5
  Top Layer w0.2: R24.2@-14.375,1.84 -13.795,1.84 -13.087,2.548 ACE1.4@-12.692,2.548 ; v1(-3.952,1.454) -2.086,1.454 U1.19@-1.75,1.118
  Bottom Layer w0.2: ACE1.4@-12.7,2.544 -12.159,2.544 -11.639,2.025 -11.069,1.454 v1(-3.952,1.454)
D3: ACE1.5 R25.2 U1.17 | length 16.1
  Top Layer w0.2: R25.2@-14.375,4.04 -13.74,4.04 ACE1.5@-12.692,5.088 ; v1(-3.516,1.924) -3.449,1.924 -3.39,1.983 -1.343,1.983 -1.312,1.953 -1.3,1.953 U1.17@-1.108,1.76
  Bottom Layer w0.2: ACE1.5@-12.7,5.084 -11.303,3.687 -11.303,2.28 -10.778,1.756 -4.289,1.756 -4.139,1.906 -3.535,1.906 v1(-3.516,1.924)
D4: ACE1.6 R18.2 U1.11 | length 15.8
  Top Layer w0.2: U1.11@1.432,1.436 2.032,2.036 v1(3.81,2.036) ; ACE1.6@12.708,5.088 12.828,5.088 13.758,4.158 14.348,4.158 R18.2@14.358,4.148
  Bottom Layer w0.2: v1(3.81,2.036) 3.858,1.988 4.035,1.988 4.043,1.98 4.378,1.98 4.529,1.83 10.843,1.83 11.176,2.163 11.176,3.56 ACE1.6@12.7,5.084
D5: ACE1.7 R19.2 U1.10 | length 13.6
  Top Layer w0.2: U1.10@1.75,1.118 2.16,1.528 v1(4.191,1.528) ; ACE1.7@12.708,2.548 13.091,2.165 14.104,2.165 14.347,1.923 R19.2@14.383,1.923 ; R19.2@14.338,1.973 R19.2@14.463,1.973
  Bottom Layer w0.2: v1(4.191,1.528) 11.053,1.528 11.478,1.952 11.595,2.069 11.684,2.069 12.159,2.544 ACE1.7@12.7,2.544
D6: ACE1.9 R20.2 U1.9 | length 15.3
  Top Layer w0.2: U1.9@2.068,0.799 2.289,1.02 v1(4.572,1.02) ; ACE1.9@12.708,-2.532 13.091,-2.149 14.054,-2.149 14.372,-1.832 R20.2@14.408,-1.832
  Bottom Layer w0.2: v1(4.572,1.02) 4.608,1.02 4.814,1.226 10.589,1.226 11.303,0.512 11.303,-1.139 ACE1.9@12.7,-2.536
D7: ACE1.10 R21.2 U1.8 | length 17.3
  Top Layer w0.2: U1.8@2.386,0.488 4.929,0.488 v1(4.953,0.512) ; ACE1.10@12.708,-5.072 13.748,-4.032 R21.2@14.408,-4.032
  Bottom Layer w0.2: v1(4.953,0.512) 5.366,0.925 10.464,0.925 11.001,0.387 11.001,-3.377 ACE1.10@12.7,-5.076
EN: Q1.1 R17.1 U1.1 | length 9.9
  Top Layer w0.2: Q1.1@-6.092,-3.967 -6.055,-3.929 v1@-4.78,-3.929 ; R17.1@-5.017,-2.982 -5.017,-3.549 -4.78,-3.787 v1@-4.78,-3.929 ; v1(-4.742,-3.892) v1@-4.78,-3.929 ; U1.1@0.485,-2.378 v1(1.299,-3.192)
  Bottom Layer w0.2: v1(-4.742,-3.892) -4.25,-3.4 1.057,-3.4 1.265,-3.192 v1(1.299,-3.192)
GND: C1.2 C2.2 C3.2 C4.2 C5.2 C6.2 C7.2 C8.2 IS1.9 IS1.24 IS1.28 IS1.33 LD1.2 P1.1 P1.3 P1.5 P1.7 P1.9 P1.11 P2.1 P2.3 P2.5 P2.7 P2.9 P2.11 P3.1 P3.4 P4.1 P4.4 R1.2 R18.1 R19.1 R20.1 R21.1 R22.1 R23.1 R24.1 R25.1 R30.2 R31.1 U1.4 U1.18 U1.29 | length 53.4
  Top Layer w0.2: R22.1@-14.392,-3.152 -14.384,-3.144 -14.384,-2.484 v1(-14.375,-2.475) ; v1(-14.385,-0.315) -14.385,-0.925 R23.1@-14.375,-0.935 ; v1(-14.375,0.325) R24.1@-14.375,0.96 ; v1(-14.375,2.525) R25.1@-14.375,3.16 ; v1(-9.25,-4.575) R31.1@-9.25,-3.93 ; v1(-8.017,2.533) P2.11@-9.522,2.533 P2.9@-9.522,3.803 -9.511,3.814 v1(-8.001,3.814) ; v1(-8.001,5.084) -9.511,5.084 P2.7@-9.522,5.073 P2.5@-9.522,6.343 -9.511,6.354 v1(-8.001,6.354) ; v1(-8.001,7.624) -9.511,7.624 P2.3@-9.522,7.613 P2.1@-9.522,8.883 -9.511,8.894 v1(-8.001,8.894) ; v1(-6.856,-7.498) C6.2@-6.271,-7.498 R30.2@-6.271,-6.698 v1(-6.856,-6.698) ; v1(-3.392,2.783) C4.2@-2.832,2.783 ; v1(-2.967,-7.917) -2.899,-7.917 -2.774,-8.042 IS1.28@-1.917,-8.042 IS1.33@-0.192,-8.042 ; v1(-2.467,-3.942) -2.462,-3.947 -1.822,-3.947 R1.2@-1.817,-3.952 C8.2@-0.992,-3.952 C8.2@-0.987,-3.947 ; v1(-1.95,6.8) C1.2@-1.95,7.36 -1.945,7.355 -0.98,7.355 LD1.2@-0.975,7.35 v1(-0.288,7.35) ; v1(-1.542,-5.592) -1.392,-5.742 IS1.24@-1.392,-6.317 -1.392,-6.842 v3(-0.542,-7.692) IS1.33@-0.192,-8.042 ; U1.18@-1.424,1.44 U1.29@0.008,0.008 U1.4@1.44,-1.424 2.183,-2.167 v1(2.708,-2.167) ; IS1.9@1.933,-9.651 2.152,-9.651 2.153,-9.652 2.153,-9.707 2.639,-10.193 2.639,-10.448 v1(2.683,-10.492) ; IS1.9@1.933,-9.642 1.408,-9.642 v3(0.558,-8.792) IS1.33@0.008,-8.242 IS1.33@-0.192,-8.042 ; v1(2.65,5.7) C2.2@2.65,6.4 3.34,6.4 3.514,6.574 3.514,6.577 3.671,6.735 C5.2@3.675,6.735 v1(3.675,6.125) ; C3.2@3.273,-3.092 v1(3.883,-3.092) ; v1(4.533,-2.667) C7.2@5.458,-2.667 ; P1.9@5.703,4.078 5.703,2.808 5.728,2.833 6.069,2.492 v1(7.283,2.492) ; P1.7@5.703,5.073 5.703,6.279 P1.5@5.735,6.311 ; P1.5@5.703,6.343 P1.5@5.735,6.311 ; P1.3@5.703,7.888 5.703,9.158 6.283,9.158 6.59,8.851 6.609,8.869 v1(7.276,8.869) ; v1(7.268,6.323) 7.256,6.311 P1.5@5.735,6.311 ; R21.1@14.358,-3.152 v1(14.358,-2.517) ; R20.1@14.358,-0.952 v1(14.358,-0.292) ; v1(14.358,0.383) R19.1@14.358,1.043 ; v1(14.358,2.608) R18.1@14.358,3.268
  other v1: 0,0
  other v3: -0.542,-8.792 0.558,-7.692
  other v4: 0.008,-0.841 -0.841,0.008 0.857,0.008 0.008,0.857
  other v5: 8.458,-2.467
INT: P1.12 P2.12 R27.2 R32.1 | length 23.3
  Top Layer w0.2: P2.12@-5.712,2.533 -5.432,2.813 -4.28,2.813 -4.085,3.008 v1(-4.017,3.008) ; R27.2@1.098,4.383 R27.2@1.125,4.41 1.14,4.395 1.14,3.371 v1(1.156,3.356) v1@1.182,3.382 ; R32.1@5.416,-0.975 6.1,-0.975 6.887,-0.187 8.95,1.875 8.95,2.528 9.23,2.808 P1.12@9.238,2.808 ; v1(7.883,2.858) 7.928,2.813 9.233,2.813 P1.12@9.238,2.808 ; P1.12@9.513,2.533 P1.12@9.238,2.808
  Bottom Layer w0.2: v1(-4.017,3.008) -3.971,3.008 -3.079,3.9 -2.414,3.9 -2.404,3.91 -2.03,3.91 -2.02,3.9 0.612,3.9 v1(1.156,3.356) 7.385,3.356 v1(7.883,2.858)
MISO: J1.2 P1.2 P2.2 | length 16
  Top Layer w0.2: P2.2@-5.712,8.883 -3.409,8.883 J1.2@-3.292,8.766 -3.167,8.891 -3.226,8.95 v1(-2.3,8.95) ; v1(7.95,8.62) 9.25,8.62 P1.2@9.513,8.883
  Bottom Layer w0.2: v1(-2.3,8.95) -2.258,8.95 -2.058,8.75 6.375,8.75 6.809,8.316 7.579,8.316 7.882,8.62 v1(7.95,8.62)
MISO_T88: J1.1 P2.4 U1.14 | length 9.4
  Top Layer w0.2: P2.4@-5.715,7.624 -5.588,7.751 J1.1@-3.302,7.751 ; J1.1@-3.292,7.75 -3.292,6.183 U1.14@0.491,2.4
MOSI_T88: P1.4 U1.13 | length 11.5
  Top Layer w0.2: U1.13@0.795,2.072 0.99,2.267 4.275,5.552 4.275,6.807 4.392,6.925 7.725,6.925 8.161,7.361 9.008,7.361 P1.4@9.255,7.608
NetIS1_1: IS1.1 R4.1 | length 2.2
  Top Layer w0.2: R4.1@-2.692,-11.627 -2.628,-11.563 -2.628,-11.203 -2.359,-10.934 -1.949,-10.934 -1.392,-10.377 IS1.1@-1.392,-10.167
NetIS1_2: IS1.2 R13.1 | length 1.8
  Top Layer w0.2: R13.1@-1.917,-11.627 -1.817,-11.527 -1.817,-11.317 -1.002,-10.502 -1.002,-10.177 IS1.2@-0.992,-10.167
NetIS1_3: IS1.3 R5.1 | length 1.7
  Top Layer w0.2: R5.1@-1.142,-11.627 -1.142,-11.142 -0.602,-10.602 -0.602,-10.177 IS1.3@-0.592,-10.167
NetIS1_4: IS1.4 R6.1 | length 1.5
  Top Layer w0.2: R6.1@-0.367,-11.627 -0.342,-11.602 -0.342,-11.067 -0.192,-10.917 IS1.4@-0.192,-10.167
NetIS1_5: IS1.5 R14.1 | length 1.5
  Top Layer w0.2: IS1.5@0.208,-10.167 0.208,-10.842 0.408,-11.042 R14.1@0.408,-11.627
NetIS1_6: IS1.6 R7.1 | length 1.7
  Top Layer w0.2: IS1.6@0.608,-10.167 0.618,-10.177 0.618,-10.602 1.183,-11.167 R7.1@1.183,-11.627
NetIS1_7: IS1.7 R8.1 | length 3.2
  Top Layer w0.2: IS1.7@1.008,-10.167 1.018,-10.177 1.018,-10.492 2.168,-11.642 R8.1@3.393,-11.642
NetIS1_8: IS1.8 R15.1 | length 2.6
  Top Layer w0.2: IS1.8@1.408,-10.167 1.408,-10.377 2.147,-11.116 3.148,-11.116 3.393,-10.871 R15.1@3.393,-10.867
NetIS1_10: IS1.10 R9.1 | length 1.8
  Top Layer w0.2: IS1.10@1.933,-9.242 2.526,-9.242 3.215,-9.931 3.235,-9.931 3.393,-10.088 R9.1@3.393,-10.092
NetIS1_11: IS1.11 R10.1 | length 1.7
  Top Layer w0.2: IS1.11@1.933,-8.842 2.553,-8.842 2.867,-9.156 3.235,-9.156 3.393,-9.313 R10.1@3.393,-9.317
NetIS1_12: IS1.12 R16.1 | length 1.5
  Top Layer w0.2: IS1.12@1.933,-8.442 2.627,-8.442 2.752,-8.567 R16.1@3.393,-8.567
NetIS1_13: IS1.13 R11.1 | length 1.6
  Top Layer w0.2: IS1.13@1.933,-8.042 2.564,-8.042 2.814,-7.792 R11.1@3.393,-7.792
NetIS1_17: IS1.17 LED26.1 LED26.3 LED26.5 LED27.1 LED27.3 LED27.5 LED28.1 LED28.3 LED28.5 LED29.1 LED29.3 LED29.5 LED30.1 LED30.3 LED30.5 | length 137.2
  Top Layer w0.2: IS1.17@1.408,-6.317 1.408,-6.31 1.418,-6.3 5.267,-6.3 10.225,-11.258 10.225,-13.584 6.273,-17.537 6.273,-17.677 v1(6.225,-17.725)
  Bottom Layer w0.15: -8.263,-15.542 ccw(c-8.162,-15.431) -8.232,-15.564 ; -8.247,-15.557 -8.232,-15.564 ; 6.016,-16.625 5.971,-16.58 5.908,-16.58 5.846,-16.581 3.152,-17.272 2.631,-17.391 -0.368,-17.526 -1.432,-17.526 -4.372,-17.021 -4.594,-16.958 -4.599,-16.956 -4.619,-16.952 -4.93,-16.903 -7.736,-15.778 -8.222,-15.569 ; 6.017,-16.626 LED28.5@6.801,-17.438 ; v1(6.225,-17.725) LED28.5@6.801,-17.438 ; -8.232,-15.564 ccw(c-8.162,-15.431) -8.222,-15.569 ; -8.232,-15.564 -8.222,-15.569 ; -8.222,-15.569 -11.376,-12.941 -11.417,-12.906 -11.48,-12.906 LED27.1@-13.343,-13.123 LED27.3@-13.945,-12.454 LED27.5@-14.548,-11.786 -14.742,-9.001 -14.746,-8.945 -14.787,-8.904 -14.832,-8.861 -15.229,-8.486 -15.592,-8.124 -15.877,-7.629 -16.908,-4.791 -17.084,-4.273 -17.504,-1.286 -17.564,-0.769 -17.564,-0.269 -17.373,2.598 -17.342,2.801 -17.342,2.804 -17.34,2.815 -17.313,3.166 -15.73,6.806 -15.718,6.835 -15.718,6.906 LED26.1@-16.657,8.553 LED26.3@-16.207,9.333 LED26.5@-15.757,10.112 -13.63,10.495 -13.6,10.5 -13.561,10.525 -13.506,10.58 -12.781,12.015 -12.739,12.064 -12.398,12.448 -12.048,12.798 -9.718,14.644 -9.255,14.98 -6.568,16.309 -6.058,16.541 -3.17,17.295 -3.151,17.3 -2.614,17.403 -2.105,17.403 2.114,17.204 2.117,17.204 2.183,17.204 2.238,17.259 LED30.1@3.026,18.479 LED30.3@3.906,18.291 LED30.5@4.786,18.104 7.008,15.936 7.012,15.933 7.057,15.894 9.266,14.972 9.729,14.636 12.065,12.779 12.414,12.43 12.756,12.046 14.609,9.777 14.614,9.771 14.688,9.697 14.951,9.225 16.344,6.558 16.518,6.018 17.179,3.383 17.189,3.342 17.245,3.286 LED29.1@18.498,2.909 LED29.3@18.592,2.014 LED29.5@18.686,1.119 17.545,-0.971 17.531,-0.998 17.527,-1.035 17.502,-1.308 17.07,-4.315 16.894,-4.833 15.866,-7.648 15.581,-8.142 13.985,-10.677 13.602,-11.103 13.484,-11.22 11.534,-13.219 11.178,-13.575 10.747,-13.88 8.403,-15.351 8.389,-15.36 8.333,-15.416 8.333,-15.485 LED28.1@8.445,-16.706 LED28.3@7.623,-17.072 LED28.5@6.801,-17.438
NetIS1_18: IS1.18 LED21.1 LED21.3 LED21.5 LED22.1 LED22.3 LED22.5 LED23.1 LED23.3 LED23.5 LED24.1 LED24.3 LED24.5 LED25.1 LED25.3 LED25.5 | length 139.9
  Top Layer w0.2: IS1.18@1.008,-6.317 1.008,-5.917 1.13,-5.795 5.686,-5.795 10.625,-10.734 10.625,-16.625 10.475,-16.775 v1(9.8,-16.775)
  Bottom Layer w0.15: 1.511,17.822 1.569,17.825 ; v1(9.8,-16.775) 9.241,-16.775 9.065,-16.6 ; 1.569,17.825 -2.718,17.654 -3.275,17.532 -6.113,16.792 -6.188,16.767 -8.692,15.604 -8.7,15.6 -9.337,15.232 -11.557,13.824 LED21.5@-13.308,13.17 LED21.3@-13.911,12.501 LED21.1@-14.513,11.833 -16.181,10.78 -16.25,10.712 -17.435,8.659 -17.435,8.539 -16.271,6.256 -17.581,3.29 -17.59,3.224 -17.642,2.72 -17.649,2.618 -17.759,0.967 -17.759,0.965 -17.841,-0.155 -17.841,-0.883 -17.768,-1.413 -17.361,-4.319 -17.345,-4.403 -16.728,-6.594 LED22.5@-16.674,-8.515 LED22.3@-16.224,-9.295 LED22.1@-15.774,-10.074 -15.3,-12.036 -13.713,-13.799 -13.658,-13.854 -13.517,-13.854 -11.706,-13.802 -11.575,-13.802 -8.342,-15.811 -7.369,-16.197 -7.368,-16.197 -5.05,-17.138 -4.979,-17.154 -4.493,-17.256 -4.407,-17.273 -1.536,-17.777 1.223,-17.969 LED23.5@3.034,-18.469 LED23.3@3.914,-18.282 LED23.1@4.794,-18.095 6.723,-18.219 6.833,-18.219 8.999,-17.255 9.074,-17.18 9.074,-17.069 9.065,-16.6 ; 1.569,17.825 1.614,17.87 1.655,17.916 2.734,19.156 2.822,19.245 2.914,19.245 5.233,18.752 LED25.1@6.807,17.443 LED25.3@7.629,17.077 LED25.5@8.451,16.711 9.588,15.271 9.65,15.209 12.169,13.031 12.666,12.534 13.008,12.141 14.939,9.801 15.646,8.438 15.657,8.417 16.565,6.693 16.596,6.619 17.478,4.374 17.673,3.781 17.684,3.747 17.741,3.691 19.092,3.392 19.188,3.296 19.435,0.937 19.435,0.855 LED24.1@18.696,-1.015 LED24.3@18.602,-1.91 LED24.5@18.508,-2.806 17.472,-4.386 16.118,-7.715 16.083,-7.787 15.833,-8.215 15.782,-8.297 14.236,-10.774 14.183,-10.835 13.853,-11.207 13.026,-12.05 12.984,-12.094 11.786,-13.323 11.282,-13.827 9.643,-15.206 9.581,-15.268 9.103,-15.679 9.099,-15.683 9.051,-15.731 9.051,-15.794 9.052,-15.856 9.065,-16.6
NetIS1_19: IS1.19 LED16.1 LED16.3 LED16.5 LED17.1 LED17.3 LED17.5 LED18.1 LED18.3 LED18.5 LED19.1 LED19.3 LED19.5 LED20.1 LED20.3 LED20.5 | length 143.3
  Top Layer w0.2: IS1.19@0.608,-6.317 0.618,-6.307 0.618,-5.88 1.005,-5.494 6.285,-5.494 7.733,-6.942 12.568,-11.777 15.389,-11.777 16.325,-10.841 16.325,-8.061 16.999,-7.386 17.046,-7.386 17.207,-7.225 v1(17.275,-7.225)
  Mid Layer 2 w0.2: v1(-18.3,-4.275) -16.937,-3.151 -16.931,-3.146 -16.882,-3.097 -16.882,-3.028 -17.223,0.358 -17.224,0.366 -17.224,0.383 -17.216,0.443 -16.777,3.934 -16.775,3.95 -15.58,7.335 -15.575,7.35 -13.649,10.442 ; v1(-17.3,-7.1) -15.652,-7.149 -15.594,-7.207 -15.584,-7.226 -14.225,-9.725 -14.214,-9.737 -11.857,-12.467 -11.846,-12.478 -11.837,-12.485 -8.975,-14.625 -8.964,-14.631 -5.775,-16.275 -5.758,-16.279 -2.328,-17.118 -2.28,-17.166 -2.269,-17.189 v1(-1.55,-18.7) ; -13.63,10.466 ccw(c-13.522,10.362) -13.649,10.442 ; v1(-12.25,14.225) -11.697,12.71 -11.697,12.626 -11.735,12.583 -13.649,10.442 ; v1(-9.775,16.025) -8.339,15.139 -8.303,15.117 -8.232,15.117 -4.938,16.42 -4.925,16.425 -4.897,16.43 -1.389,17.097 -1.375,17.1 2.225,17.1 5.709,16.229 5.725,16.225 5.762,16.207 8.455,14.872 8.486,14.857 8.582,14.857 v1(9.725,15.975) ; v1(1.575,-18.7) 1.817,-17.274 1.88,-17.211 1.919,-17.201 4.95,-16.425 4.961,-16.42 8.2,-15.025 8.211,-15.017 11.148,-13.051 11.16,-13.039 11.161,-13.038 13.575,-10.5 13.583,-10.487 15.446,-7.496 15.495,-7.448 15.546,-7.441 v1(17.275,-7.225) ; v1(12.275,14.225) 11.844,12.501 11.839,12.483 11.839,12.408 14.164,9.738 14.175,9.725 14.201,9.677 15.867,6.539 15.875,6.525 15.885,6.49 16.797,3.237 16.8,3.225 16.802,3.205 17.173,-0.433 17.174,-0.44 17.174,-0.458 16.813,-3.35 16.811,-3.359 16.811,-3.431 16.87,-3.489 v1(18.275,-4.275)
  Bottom Layer w0.15: v1(-18.3,-4.275) LED17.5@-18.086,-4.846 ; LED17.1@-17.53,-6.558 v1(-17.3,-7.1) ; v1(-12.25,14.225) LED16.1@-11.736,14.592 ; v1(9.725,15.975) LED20.1@10.29,15.642 ; LED20.5@11.747,14.584 v1(12.275,14.225) ; v1(17.275,-7.225) LED19.5@17.516,-6.6 ; LED19.1@18.073,-4.888 v1(18.275,-4.275)
  Bottom Layer w0.2: LED17.5@-18.086,-4.846 LED17.3@-17.808,-5.702 LED17.1@-17.53,-6.558 ; LED16.1@-11.736,14.592 LED16.3@-11.007,15.121 LED16.5@-10.279,15.65 v1(-9.775,16.025) ; v1(-1.55,-18.7) LED18.5@-0.9,-18.696 LED18.3@0,-18.696 0.45,-18.696 ; LED18.1@0.9,-18.696 0.45,-18.696 ; v1(1.575,-18.7) 0.9,-18.698 0.45,-18.696 ; LED20.1@10.29,15.642 LED20.3@11.018,15.113 LED20.5@11.747,14.584 ; LED19.5@17.516,-6.6 LED19.3@17.795,-5.744 LED19.1@18.073,-4.888